# EAGLE board OLM-base_v0.8 (EAGLE 6.4)
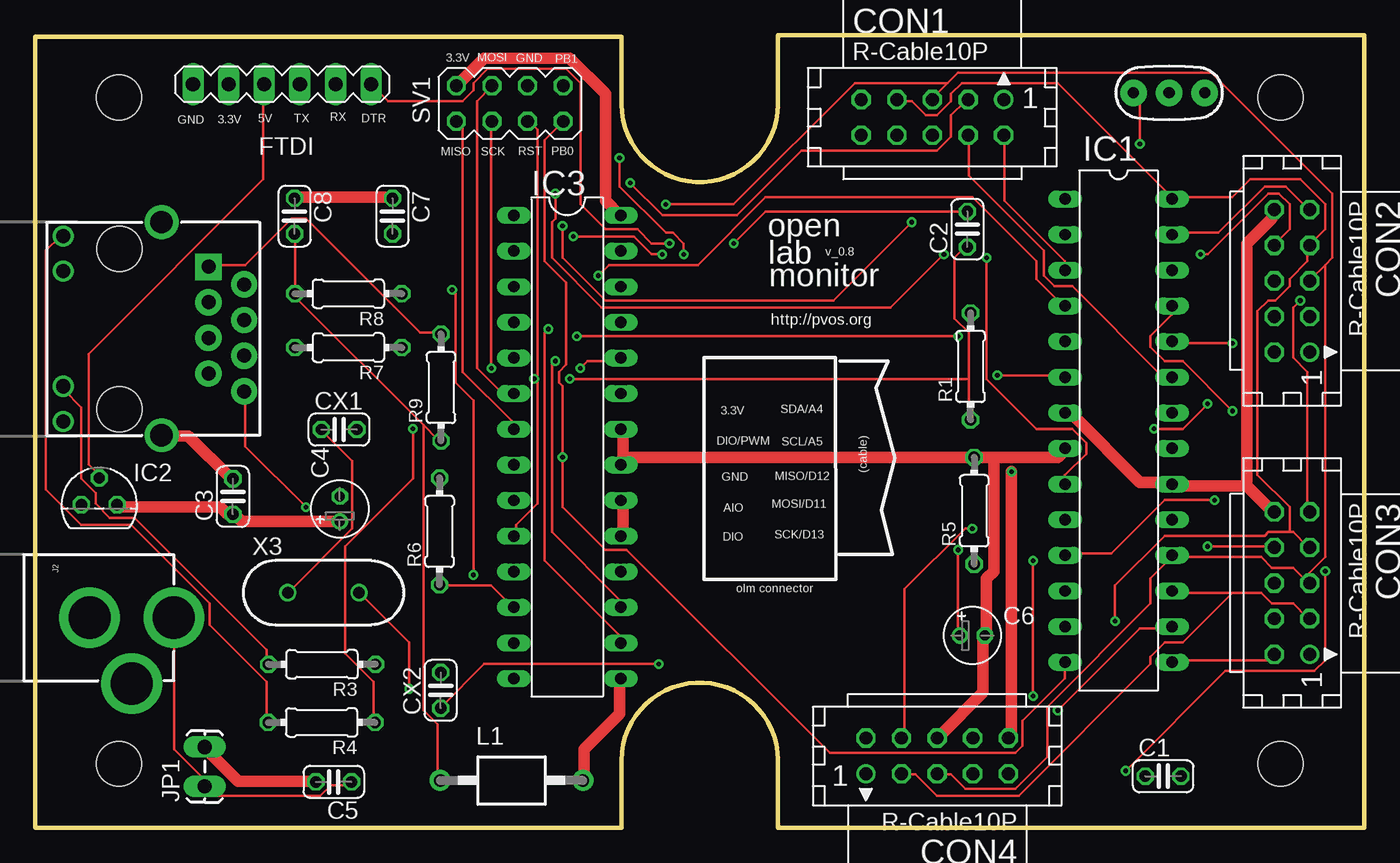
[diagram p0: board, top side]
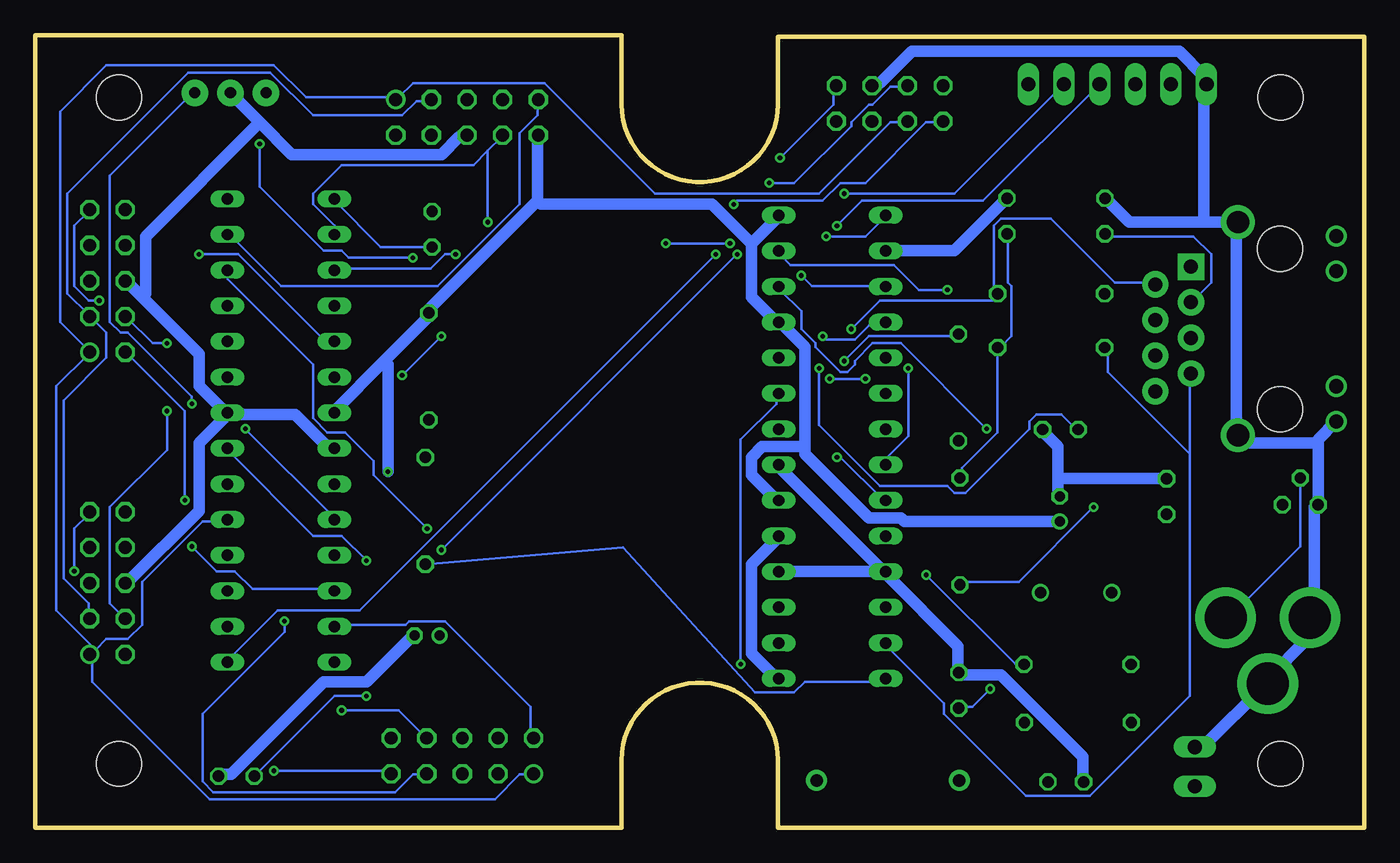
[diagram p1: board, bottom side, seen from below]

Size 94.74 x 56.52 mm. Coordinates in mm from the lower left corner, seen from the top.
Outline: 94.61,0 52.96,0 52.96,4.85
Outline: 41.78,4.9 41.78,0 0,0 0,56.39 41.78,56.39 41.78,51.51
Outline: 41.78,4.83 arc-179 52.96,4.83
Outline: 41.78,51.56 arc179 52.96,51.56 52.96,56.52 94.74,56.52 94.74,0
Copper layers (1*16): Top 0.0356mm / dielectric 1.5011mm / Bottom 0.0356mm
Design rules "LaenPCBOrder": minimum track width 6mil, minimum drill 13mil, track to track 6mil, track to pad 6mil, pad to pad 6mil, via to via 6mil, smd to smd 6mil, copper to edge 15mil, drill to drill 6mil, minimum pad ring 7mil, minimum via ring 7mil, stop-mask expansion 4mil, vias tented up to drill 0mil, thermal gap 10mil
Net classes: 0 default: width 0.178 mm, drill 0.33 mm, clearance 0.203 mm; 1 power: width 0.813 mm, drill 0.33 mm, clearance 0.203 mm to class 0, clearance 0.203 mm; 2 gnd: width 0.305 mm, drill 0.559 mm, clearance 0.203 mm to class 0, clearance 0.203 mm to class 1, clearance 0.254 mm
Holes 3.2 mm at 5.97,52.07 88.77,52.07 88.77,4.57 5.97,4.57

## Footprints (pad centres in the part's own frame; a part is rotated, then mirrored left to right if it is on the bottom)
C025-024X044 = drill 0.813 octagon: 1 -1.27,0; 2 1.27,0
E1,8-4 = drill 0.711 pad 1.168: + -0.889,0 | drill 0.711 pad 1.168 octagon: - 0.889,0
CON10L = drill 0.914: 1 5.08,1.27 | drill 0.914 octagon: 2 5.08,-1.27; 3 2.54,1.27; 4 2.54,-1.27; 5 0,1.27; 6 0,-1.27; 7 -2.54,1.27; 8 -2.54,-1.27; 9 -5.08,1.27; 10 -5.08,-1.27
MA06-1 = drill 1.016 long: 1 0,0; 2 2.54,0; 3 5.08,0; 4 7.62,0; 5 10.16,0; 6 12.7,0
DIL28-3 = drill 0.813 long: 1 -16.51,-3.81; 2 -13.97,-3.81; 3 -11.43,-3.81; 4 -8.89,-3.81; 5 -6.35,-3.81; 6 -3.81,-3.81; 7 -1.27,-3.81; 8 1.27,-3.81; 9 3.81,-3.81; 10 6.35,-3.81; 11 8.89,-3.81; 12 11.43,-3.81; 13 13.97,-3.81; 14 16.51,-3.81; 15 16.51,3.81; 16 13.97,3.81; 17 11.43,3.81; 18 8.89,3.81; 19 6.35,3.81; 20 3.81,3.81; 21 1.27,3.81; 22 -1.27,3.81; 23 -3.81,3.81; 24 -6.35,3.81; 25 -8.89,3.81; 26 -11.43,3.81; 27 -13.97,3.81; 28 -16.51,3.81
TO92 = drill 0.813 octagon: 1 -1.27,0; 2 0,1.905; 3 1.27,0
MAGJACK = drill 1 pad 1.88 square: 1 3.175,17.445 | drill 1 pad 1.88: 2 4.445,19.985; 3 5.715,17.445; 4 6.985,19.985; 5 8.255,17.445; 6 9.525,19.985; 7 10.795,17.445; 8 12.065,19.985 | drill 1 pad 1.27: 9 1,7.1; 10 3.5,7.1; 11 11.7,7.1; 12 14.2,7.1 | drill 1.6 pad 2.184: M1 0,14.1; M2 15.2,14.1 | hole 3.2: 1.905,11.095; 13.335,11.095
POWER_JACK_PTH = drill 2.997 pad 4.318: GND 0,7.7; GNDBREAK 4.7,10.7; PWR 0,13.7
1X02_LOCK_LONGPADS = drill 1.016 long: 1 -0.127,0; 2 2.667,0
BL01RN1A = drill 0.9 pad 1.5: 1 -5.08,0; 2 5.08,0
0204/7 = drill 0.813 octagon: 1 -3.81,0; 2 3.81,0
MA04-2 = drill 0.9 octagon: 1 -3.81,-1.27; 2 -3.81,1.27; 3 -1.27,-1.27; 4 -1.27,1.27; 5 1.27,-1.27; 6 1.27,1.27; 7 3.81,-1.27; 8 3.81,1.27
RESONATOR-PTH = drill 0.8 pad 1.88: 1 -2.54,0; 2 0,0; 3 2.54,0
HC49US = drill 0.813: 1 -2.54,0; 2 2.54,0

## Placement (x,y rotation side)
C1  0.1µ  [C025-024X044]  80.39,3.68 0 top
C2  0.1µ  [C025-024X044]  66.45,42.67 90 top
C3  0.1µ  [C025-024X044]  14.1,23.62 90 top
C4  10µ  [E1,8-4]  21.72,22.73 90 top
C5  0.1µ  [C025-024X044]  21.29,3.28 180 top
C6  10u  [E1,8-4]  66.8,13.72 0 top
C7  0.1µ  [C025-024X044]  25.48,43.61 270 top
C8  0.1µ  [C025-024X044]  18.49,43.61 270 top
CON1  [CON10L]  63.96,50.65 0 top
CON2  [CON10L]  89.59,38.99 270 top
CON3  [CON10L]  89.59,17.45 270 top
CON4  [CON10L]  64.29,5.13 180 top
CX1  18p  [C025-024X044]  21.67,28.4 0 top
CX2  18p  [C025-024X044]  28.91,9.8 90 top
FTDI  FTDI  [MA06-1]  11.25,53.01 0 top
IC1  ATMEGA  [DIL28-3]  77.22,28.32 270 top
IC2  MCP1702-33  [TO92]  4.57,23.04 0 top
IC3  ENC28J60SP  [DIL28-3]  37.92,27.15 270 top
J1  MAGJACK  [MAGJACK]  -5.08,43.18 270 top
J2  POWER_JACKPTH  [POWER_JACK_PTH]  -3.81,14.99 270 top
JP1  BATT  [1X02_LOCK_LONGPADS]  12.09,3.1 90 top
L1  BL01RN1A  [BL01RN1A]  33.96,3.38 0 top
R1  10k  [0204/7]  66.67,32.89 90 top
R3  1K  [0204/7]  20.45,11.66 180 top
R4  1K  [0204/7]  20.42,7.52 180 top
R5  2.32K  [0204/7]  66.93,22.61 90 top
R6  49.9  [0204/7]  28.83,21.13 90 top
R7  49.9  [0204/7]  22.33,34.24 180 top
R8  49.9  [0204/7]  22.33,38.07 180 top
R9  49.9  [0204/7]  28.93,31.39 90 top
SV1  SPI/ISP  [MA04-2]  33.83,51.64 0 top
X1  16 MHz  [RESONATOR-PTH]  80.82,52.4 0 top
X3  25MHz  [HC49US]  20.55,16.76 0 top

## Library data of the parts
C1-C8 CX1 CX2 R1 = resistor
CON1-CON4 = con-harting; OC_FARNELL: unknown; OC_NEWARK: unknown
FTDI IC2 SV1 = JeeLabs
IC1 = atmega8
IC3 = microchip; MF: MICROCHIP; MPN: ENC28J60/SP; OC_FARNELL: 1084619; OC_NEWARK: 96K3661
J1 JP1 X1 X3 = SparkFun
J2 = SparkFun-Connectors
L1 = inductors
R3-R9 = rcl

## Nets
A0: CON1.4 IC1.23
A1: CON2.4 IC1.24
A2: CON3.4 IC1.25
A3: CON4.4 IC1.26
D0/RX: CON1.8 FTDI.4 IC1.2
D1/TX: CON1.2 FTDI.5 IC1.3
D2: IC1.4 IC3.3
D3/PWM: CON2.8 IC1.5
D4: IC1.6 IC3.4
D5/PWM: CON2.2 IC1.11
D6/PWM: CON3.8 IC1.12
D7: CON4.2 IC1.13
D10/PWM: CON4.8 IC1.16
GND [power]: C1.2 C3.2 C4.- C5.2 C6.- C7.1 C8.1 CON1.6 CON2.6 CON3.6 CON4.6 CX1.2 CX2.2 FTDI.1 IC1.8 IC1.22 IC2.1 IC3.2 IC3.11 IC3.18 IC3.21 IC3.22 J1.12 J1.M1 J1.M2 J2.GND J2.GNDBREAK JP1.2 R5.2 SV1.6 X1.2
LEDA: J1.11 R3.2
LEDB: J1.9 R4.2
MISO/D12: CON1.5 CON2.5 CON3.5 CON4.5 IC1.18 IC3.7 SV1.1
MOSI/D11: CON1.3 CON2.3 CON3.3 CON4.3 IC1.17 IC3.6 SV1.4
N$1: IC1.9 X1.1
N$19: C1.1 IC1.21
N$20: C2.2 FTDI.6
N$21: IC1.10 X1.3
N$36: J1.10
N$37: IC3.27 R3.1
N$39: IC3.26 R4.1
N$50: C6.+ IC3.1
N$51: IC3.14 R5.1
N$52: CX1.1 IC3.24 X3.1
N$53: CX2.1 IC3.23 X3.2
N$54: C7.2 R6.2 R7.1
PB0/D8: IC1.14 IC3.9 SV1.7
PB1/D9/PWM: CON3.2 IC1.15 SV1.8
RD+: IC3.13 J1.7 R7.2
RD-: IC3.12 J1.8 R6.1
RESET: C2.1 IC1.1 IC3.10 R1.1 SV1.5
SCK/D13: CON1.1 CON2.1 CON3.1 CON4.1 IC1.19 IC3.8 SV1.3
SCL/A5: CON1.7 CON2.7 CON3.7 CON4.7 IC1.28
SDA/A4: CON1.9 CON2.9 CON3.9 CON4.9 IC1.27
TCT: C8.2 J1.3 L1.1 R8.2 R9.1
TD+: IC3.17 J1.1 R9.2
TD-: IC3.16 J1.2 R8.1
VCC [power]: C3.1 C4.+ CON1.10 CON2.10 CON3.10 CON4.10 IC1.7 IC1.20 IC2.3 IC3.15 IC3.19 IC3.20 IC3.25 IC3.28 L1.2 R1.2 SV1.2
VIN: C5.1 FTDI.3 IC2.2 J2.PWR JP1.1

## Tracks (layer width: path | path; a pad name or v marks a point on that pad's centre or on a via)
A0
  Top 0.178: IC1.23 81.03,32.26 80.26,32.26 73.91,38.61 72.64,38.61 71.88,39.37 71.88,41.15 66.55,46.48 66.55,49.28 CON1.4
A1  (via drill 0.33)
  Top 0.178: v85.34,34.54 81.03,34.54 IC1.24
  Bottom 0.178: v85.34,34.54 86.36,34.54 88.14,36.32 CON2.4
A2  (via drill 0.33)
  Top 0.178: IC1.25 81.03,36.58 79.5,35.05 79.5,34.29 80.52,33.27 81.79,33.27 v85.34,29.72
  Bottom 0.178: v85.34,29.72 85.34,26.92 89.41,22.86 89.41,16 CON3.4
A3  (via drill 0.33)
  Top 0.178: v66.8,21.34 66.29,21.34 61.98,17.02 61.98,6.6 CON4.4
  Bottom 0.178: IC1.26 81.03,39.12 74.93,33.02 74.93,29.21 73.91,28.19 72.64,28.19 70.61,26.16 70.61,25.15 v66.8,21.34
D0/RX  (via drill 0.33)
  Top 0.178: v37.59,42.93 37.59,40.64 40.64,37.59 56.9,37.59 v62.48,43.18
  Bottom 0.178: IC1.2 73.41,42.93 74.93,44.45 74.93,45.21 72.9,47.24 63.5,47.24 62.48,48.26 | 62.48,48.26 61.47,49.28 CON1.8 | FTDI.4 27.18,44.7 35.81,44.7 v37.59,42.93 | 62.48,48.26 v62.48,43.18
D1/TX  (via drill 0.33)
  Top 0.178: IC1.3 73.41,40.39 69.09,44.7 69.09,49.28 CON1.2 | v37.08,45.21 37.08,43.43 36.83,43.18 36.83,40.64 40.39,37.08 60.96,37.08 v64.77,40.89
  Bottom 0.178: FTDI.5 29.21,45.21 v37.08,45.21 | v64.77,40.89 65.53,40.89 66.55,39.88 73.41,39.88 IC1.3
D2  (via drill 0.33)
  Top 0.178: v40.13,39.37 40.89,40.13 47.24,40.13 52.07,44.96 66.8,44.96 71.37,40.39 71.37,39.12 73.41,37.08 IC1.4
  Bottom 0.178: v40.13,39.37 39.37,38.61 34.29,38.61 IC3.3
D3/PWM  (via drill 0.33)
  Top 0.178: v83.06,40.89 83.57,40.89 87.88,45.21 88.65,45.21 89.41,44.45 89.41,42.67 88.39,41.66 CON2.8
  Bottom 0.178: v83.06,40.89 80.26,40.89 74.17,34.8 73.41,34.8 IC1.5
D4  (via drill 0.33)
  Top 0.178: v65.79,35.05 v38.61,35.05 | v68.58,32.26 73.41,32.26 IC1.6
  Bottom 0.178: v38.61,35.05 38.35,34.8 36.32,34.8 35.31,35.81 34.29,35.81 IC3.4 | v68.58,32.26 v65.79,35.05
D5/PWM  (via drill 0.33)
  Top 0.178: v84.07,23.37 80.52,23.37 76.71,19.56 73.41,19.56 IC1.11
  Bottom 0.178: v84.07,23.37 84.07,29.72 88.14,33.78 CON2.2
D6/PWM  (via drill 0.33)
  Top 0.178: v83.57,20.07 88.14,20.07 CON3.8
  Bottom 0.178: v83.57,20.07 81.79,18.29 80.52,18.29 79.25,17.02 73.41,17.02 IC1.12
D7
  Bottom 0.178: IC1.13 73.41,14.48 68.33,14.48 68.07,14.73 65.53,14.73 59.44,8.64 59.44,6.6 CON4.2
D10/PWM  (via drill 0.33)
  Top 0.178: v72.9,8.38 78.74,14.22 81.03,14.22 IC1.16
  Bottom 0.178: v72.9,8.38 68.83,8.38 67.06,6.6 CON4.8
GND
  Top 0.813: CON4.6 64.52,6.6 67.56,9.65 67.56,13.72 C6.- 67.82,13.97 67.82,17.78 68.33,18.29 68.33,26.42 | 68.33,26.42 72.9,26.42 73.41,26.92 IC1.8 | 68.33,26.42 R5.2 42.16,26.42 IC3.21 41.91,25.91 41.91,28.19 IC3.22 | C8.1 18.54,44.96 25.4,44.96 C7.1 | J1.M2 9.14,27.94 10.92,27.94 13.97,24.89 C3.2 | C5.2 19.81,3.3 14.48,3.3 12.19,5.59 JP1.2
  Bottom 0.813: C1.2 81.53,3.81 80.77,3.81 74.17,10.41 71.12,10.41 67.82,13.72 C6.- | 78.74,50.29 80.77,52.32 X1.2 | 78.74,50.29 76.45,48.01 65.79,48.01 64.52,49.28 64.01,49.28 CON1.6 | IC1.22 81.03,29.46 76.2,29.46 73.91,27.18 73.41,27.18 IC1.8 | CON3.6 88.14,17.53 83.06,22.61 83.06,27.43 81.28,29.21 IC1.22 | 87.12,37.85 83.06,33.78 83.06,31.5 81.28,29.72 IC1.22 | 87.12,37.85 88.14,38.86 CON2.6 | 78.74,50.29 86.87,42.16 86.87,38.1 87.12,37.85 | SV1.6 35.05,53.09 34.54,53.09 32.26,55.37 13.21,55.37 11.43,53.59 11.43,53.09 FTDI.1 11.43,52.83 11.43,43.18 | C7.1 29.21,41.15 34.04,41.15 IC3.2 | 11.43,43.18 16.76,43.18 18.29,44.7 C8.1 | 11.43,43.18 J1.M1 9.14,42.93 9.14,28.19 J1.M2 8.89,27.94 8.38,27.43 3.3,27.43 | IC3.11 34.04,18.03 28.96,12.95 28.96,11.18 CX2.2 28.7,10.92 25.91,10.92 20.07,5.08 20.07,3.3 C5.2 | IC3.18 41.66,18.29 34.54,18.29 IC3.11 | IC3.21 41.66,25.65 34.54,18.54 IC3.11 | 3.3,27.43 3.3,27.69 2.03,28.96 J1.12 | 3.3,27.43 IC2.1 3.56,22.86 3.56,14.99 J2.GND 4.06,14.99 4.06,13.46 6.86,10.67 J2.GNDBREAK 7.11,10.16 11.43,5.84 11.94,5.84 JP1.2 | 21.84,24.89 21.84,27.18 22.86,28.19 CX1.2 | 21.84,24.89 21.84,23.62 C4.- | 21.84,24.89 C3.2
LEDA
  Top 0.178: R3.2 16.51,11.68 16.51,12.7 7.11,22.1 5.33,22.1 4.32,23.11 4.32,23.88 3.3,24.89 3.3,29.97 2.03,31.24 J1.11
LEDB
  Top 0.178: R4.2 16.51,7.62 16.51,10.41 12.45,14.48 12.45,16 6.86,21.59 3.3,21.59 0.76,24.13 0.76,41.15 1.78,42.16 J1.9
MISO/D12  (via drill 0.33)
  Top 0.178: 81.03,19.3 87.38,19.3 88.14,18.54 89.66,18.54 90.42,17.78 | 90.42,17.78 90.68,17.53 CON3.5 90.42,17.78 | 81.03,19.3 79.5,17.78 79.5,16 72.14,8.64 72.14,5.08 69.85,2.79 66.29,2.79 65.28,3.81 64.52,3.81 CON4.5 | 81.03,19.3 IC1.18 | IC3.7 34.04,28.45 34.04,28.96 30.48,32.51 30.48,50.04 30.23,50.29 SV1.1 | 65.02,53.09 65.79,53.85 83.82,53.85 92.46,45.21 92.46,40.64 91.95,40.13 | 65.02,53.09 64.01,52.07 CON1.5 | 91.95,40.13 90.93,39.12 CON2.5 | v44.96,44.45 49.78,44.45 58.42,53.09 65.02,53.09 | 90.42,17.78 91.95,19.3 91.95,40.13
  Bottom 0.178: v44.96,44.45 44.7,44.7 38.61,44.7 37.34,45.97 35.56,45.97 31.24,50.29 30.23,50.29 SV1.1
MOSI/D11  (via drill 0.33)
  Top 0.178: 85.34,16.76 87.38,16.76 88.14,16 89.66,16 90.68,14.99 CON3.3 | 85.34,16.76 81.03,16.76 IC1.17 | 85.34,16.76 81.79,13.21 80.52,13.21 79.5,12.19 79.5,11.68 70.1,2.29 64.26,2.29 62.74,3.81 61.98,3.81 CON4.3 | IC3.6 34.04,30.99 33.27,30.99 31.5,32.77 31.5,51.82 32.51,52.83 SV1.4 | v42.42,45.97 44.7,43.69 50.04,43.69 54.61,48.26 64.26,48.26 65.28,49.28 65.28,50.8 66.29,51.82 CON1.3
  Bottom 0.178: CON1.3 66.55,51.82 67.56,51.82 68.58,50.8 74.93,50.8 77.98,53.85 83.82,53.85 92.46,45.21 92.46,38.1 90.93,36.58 CON2.3 90.68,36.32 89.66,35.31 89.66,33.53 92.71,30.48 92.71,17.78 90.93,16 90.93,14.99 CON3.3 | v42.42,45.97 40.64,45.97 36.58,50.04 36.58,50.29 35.31,51.56 35.05,51.56 33.78,52.83 32.77,52.83 SV1.4
N$1  (via drill 0.33)
  Top 0.178: IC1.9 73.41,25.15 74.93,26.67 74.93,27.43 73.91,28.45 71.37,28.45 67.82,32 v67.82,40.64 | v78.74,48.77 78.74,52.07 78.49,52.32 X1.1
  Bottom 0.178: v67.82,40.64 72.39,40.64 72.9,41.15 74.17,41.15 78.74,45.72 v78.74,48.77
N$19  (via drill 0.33)
  Top 0.178: v71.12,19.05 v71.12,9.4
  Bottom 0.178: C1.1 73.41,9.4 v71.12,9.4 | v71.12,19.05 72.9,20.83 74.93,20.83 81.03,26.92 IC1.21
N$20  (via drill 0.33)
  Top 0.178: C2.2 52.07,43.94 v49.78,41.66 | v45.21,41.66 43.94,41.66 42.93,42.67 40.64,42.67 38.86,44.45 38.86,53.09 37.85,54.1 32.26,54.1 31.24,53.09 31.24,52.58 30.48,51.82 25.15,51.82 FTDI.6
  Bottom 0.178: v45.21,41.66 v49.78,41.66
N$21  (via drill 0.33)
  Top 0.178: v79.76,28.45 81.79,28.45 v83.57,30.23
  Bottom 0.178: v79.76,28.45 73.41,22.1 IC1.10 | v83.57,30.23 83.57,30.73 88.14,35.31 88.65,35.31 89.41,36.07 89.41,46.48 83.57,52.32 X1.3
N$37  (via drill 0.33)
  Top 0.178: v31.24,18.03 31.24,30.48 29.97,31.75 29.97,38.1 v29.72,38.35
  Bottom 0.178: v31.24,18.03 24.89,11.68 24.38,11.68 R3.1 | v29.72,38.35 31.75,38.35 33.53,40.13 40.89,40.13 41.66,40.89 IC3.27
N$39  (via drill 0.33)
  Top 0.178: v26.92,28.45 26.92,24.89 22.1,20.07 22.1,12.45 24.13,10.41 24.13,7.62 R4.1
  Bottom 0.178: v26.92,28.45 33.02,34.54 35.05,34.54 36.32,33.27 36.32,33.02 36.83,32.51 37.34,32.51 39.12,34.29 39.12,34.54 40.13,35.56 40.13,36.83 41.66,38.35 IC3.26
N$50  (via drill 0.33)
  Top 0.178: v65.79,19.81 65.79,13.72 C6.+ | v44.7,40.89 43.94,40.89 42.67,42.16 v38.35,42.16
  Bottom 0.178: v44.7,40.89 v65.79,19.81 | v38.35,42.16 35.56,42.16 34.29,43.43 IC3.1
N$51
  Bottom 0.178: R5.1 52.83,19.99 43.43,9.65 40.64,9.65 39.88,10.41 34.29,10.41 IC3.14
N$52  (via drill 0.33)
  Top 0.178: X3.1 18.03,16.76 22.61,21.34 22.61,26.16 20.57,28.19 CX1.1 | v38.86,32.77 39.37,33.27 41.66,33.27 IC3.24
  Bottom 0.178: v38.86,32.77 38.86,28.7 34.54,24.38 29.72,24.38 29.21,23.88 28.45,23.88 23.88,28.45 23.88,28.96 23.37,29.46 21.59,29.46 20.57,28.45 CX1.1
N$53  (via drill 0.33)
  Top 0.178: v26.67,9.91 26.67,13.21 23.11,16.76 X3.2 | v44.45,11.68 32,11.68 28.96,8.64 CX2.1
  Bottom 0.178: v26.67,9.91 27.94,8.64 28.7,8.64 CX2.1 | v44.45,11.68 44.45,27.69 41.91,30.23 41.91,30.73 IC3.23
N$54
  Bottom 0.178: R6.2 28.7,25.15 28.7,25.65 26.16,28.19 26.16,34.04 R7.1 25.91,34.29 25.15,35.05 25.15,38.61 25.4,38.86 25.4,42.16 C7.2
PB0/D8  (via drill 0.33)
  Top 0.178: SV1.7 37.59,50.29 36.32,49.02 36.32,40.39 37.85,38.86 37.85,33.02 37.34,32.51 37.34,31.75 37.59,31.5 v37.59,26.42 37.59,22.86 40.64,19.81 42.16,19.81 56.64,5.33 69.85,5.33 70.36,5.84 70.36,7.62 73.41,10.67 IC1.14
  Bottom 0.178: v37.59,26.42 37.34,26.42 34.29,23.37 IC3.9
PB1/D9/PWM  (via drill 0.33)
  Top 0.178: CON3.2 87.88,11.94 81.03,11.94 IC1.15 | v41.66,47.75 41.66,45.72 44.96,42.42 45.47,42.42 46.23,41.66 v46.23,40.89
  Bottom 0.178: v41.66,47.75 37.85,51.56 37.85,52.83 SV1.8 | v46.23,40.89 71.63,15.49 77.47,15.49 81.03,11.94 IC1.15
RD+
  Bottom 0.178: 12.45,26.67 12.45,32.26 J1.7 | 12.45,26.67 12.45,9.4 19.56,2.29 24.13,2.29 29.97,8.13 29.97,8.89 34.04,12.95 IC3.13 | 12.45,26.67 18.29,32.51 18.29,34.04 R7.2
RD-  (via drill 0.33)
  Top 0.178: R6.1 28.96,17.27 32.51,17.27 34.04,15.75 IC3.12 | v19.3,22.86 14.99,27.18 14.99,30.99 J1.8
  Bottom 0.178: v19.3,22.86 24.64,17.53 28.7,17.53 R6.1
RESET  (via drill 0.33)
  Top 0.178: 66.55,32 66.55,35.31 65.53,36.32 65.53,40.64 66.29,41.4 C2.1 | 66.55,32 66.55,29.21 R1.1 | 35.81,32 35.81,49.78 35.31,50.29 SV1.5 | 35.81,32 35.81,23.11 34.29,21.59 34.29,20.83 IC3.10 | v38.1,32 66.55,32 | 35.81,32 v35.56,32
  Bottom 0.178: C2.1 70.1,41.4 73.41,44.7 IC1.1 | v35.56,32 v38.1,32
SCK/D13  (via drill 0.33)
  Top 0.178: v32.51,32.77 32.51,50.29 SV1.3
  Bottom 0.178: 90.42,12.7 90.68,12.45 CON3.1 | 90.42,12.7 89.66,13.46 88.14,13.46 87.12,14.48 87.12,17.53 82.8,21.84 81.03,21.84 IC1.19 | CON4.1 59.44,3.81 60.2,3.81 61.98,2.03 82.3,2.03 90.68,10.41 90.68,12.19 CON3.1 | v32.51,32.77 32.51,27.94 34.04,26.42 34.04,25.91 IC3.8 | SV1.3 32.77,50.29 33.78,50.29 38.86,45.21 50.55,45.21 58.42,53.09 67.82,53.09 68.83,52.07 CON1.1 69.09,52.07 75.44,52.07 77.72,54.36 89.66,54.36 92.96,51.05 92.96,36.07 90.93,34.04 CON2.1 90.93,33.78 93.22,31.5 93.22,15.49 90.42,12.7 | 90.42,12.7 CON3.1
SCL/A5  (via drill 0.33)
  Top 0.178: 81.03,44.96 85.34,44.96 86.61,46.23 90.17,46.23 91.95,44.45 91.95,42.67 90.93,41.66 CON2.7 90.68,41.4 90.68,40.39 89.41,39.12 89.41,38.61 88.39,37.59 87.88,37.59 87.12,36.83 87.12,25.15 89.41,22.86 89.41,21.08 | 81.03,44.96 72.9,53.09 66.04,53.09 65.28,52.32 65.28,51.82 64.26,50.8 63.5,50.8 62.48,51.82 61.47,51.82 CON1.7 | 81.03,44.96 IC1.28 | v76.96,14.73 76.96,17.27 80.52,20.83 87.63,20.83 87.88,21.08 89.41,21.08 | 89.41,21.08 89.66,21.08 90.68,20.07 CON3.7
  Bottom 0.178: v76.96,14.73 76.96,13.97 82.8,8.13 82.8,3.3 82.04,2.54 69.09,2.54 67.82,3.81 67.06,3.81 CON4.7
SDA/A4  (via drill 0.33)
  Top 0.178: v77.72,4.06 84.84,11.18 91.19,11.18 91.95,11.94 v91.95,18.29 | IC1.27 81.03,42.42 84.33,42.42 87.63,45.72 89.15,45.72 90.68,44.2 CON2.9 | v90.17,37.59 89.66,37.08 89.66,33.53 90.68,32.51 90.68,22.61 CON3.9
  Bottom 0.178: v77.72,4.06 69.6,4.06 CON4.9 | v91.95,18.29 91.95,21.34 90.93,22.35 CON3.9 | CON1.9 58.93,51.82 58.93,50.8 60.2,49.53 60.2,44.45 66.04,38.61 77.22,38.61 81.03,42.42 IC1.27 | v90.17,37.59 90.93,37.59 91.95,38.61 91.95,42.93 90.93,43.94 CON2.9
TCT
  Top 0.178: C8.2 18.54,42.16 18.54,38.1 R8.2 18.54,37.85 27.69,28.7 | 27.69,28.7 28.7,27.69 R9.1 | 27.69,28.7 27.69,8.38 28.7,7.37 28.7,3.56 L1.1
  Bottom 0.178: J1.3 12.19,37.59 10.92,38.86 10.92,40.89 12.19,42.16 18.29,42.16 C8.2
TD+  (via drill 0.33)
  Top 0.178: v37.08,33.27 36.83,33.02 36.83,21.08 41.66,16.26 41.66,15.75 IC3.17 | J1.1 12.45,40.13 14.99,40.13 18.29,43.43 19.3,43.43 27.43,35.31 28.7,35.31 R9.2
  Bottom 0.178: v37.08,33.27 35.31,35.05 28.96,35.05 R9.2
TD-  (via drill 0.33)
  Top 0.178: v36.58,35.56 36.32,35.31 36.32,19.05 41.66,13.72 41.66,13.21 IC3.16
  Bottom 0.178: v36.58,35.56 34.54,37.59 26.42,37.59 | 26.42,37.59 26.16,37.85 R8.1 26.42,37.59 | 26.42,37.59 26.42,42.93 25.91,43.43 22.35,43.43 17.78,38.86 14.99,38.86 J1.2
VCC  (via drill 0.33)
  Top 0.813: 86.36,24.38 81.03,24.38 IC1.20 80.77,24.64 78.74,24.64 73.91,29.46 73.41,29.46 IC1.7 | 86.36,24.38 88.14,22.61 CON3.10 | 86.36,24.38 86.36,41.66 88.14,43.43 88.14,43.94 CON2.10 | v69.6,25.4 69.6,6.6 CON4.10 | IC3.19 41.91,20.83 41.91,23.11 IC3.20 | IC3.15 41.66,10.41 41.66,8.13 39.12,5.59 39.12,3.56 L1.2 | C4.+ 14.73,21.84 14.22,22.35 C3.1 13.72,22.35 13.21,22.86 5.84,22.86 IC2.3 | SV1.2 30.23,53.09 32,54.86 38.1,54.86 40.64,52.32 40.64,44.7 41.66,43.69 IC3.28
  Bottom 0.813: 69.85,33.27 66.55,36.58 R1.2 66.55,37.08 58.93,44.7 | 69.85,33.27 73.41,29.72 IC1.7 | v69.6,25.4 69.6,33.02 69.85,33.27 | 58.93,44.7 58.93,49.28 CON1.10 | IC3.19 41.91,20.57 43.69,18.8 43.69,12.45 41.91,10.67 IC3.15 | 43.69,41.66 43.69,37.85 41.91,36.07 IC3.25 41.4,35.81 39.88,34.29 39.88,27.18 | 43.69,41.66 41.91,43.43 IC3.28 | C4.+ 32.77,21.84 33.02,22.1 35.31,22.1 39.88,26.67 39.88,27.18 | 39.88,27.18 42.93,27.18 43.69,26.42 43.69,25.15 41.91,23.37 IC3.20 | 43.69,41.66 46.48,44.45 58.67,44.45 58.93,44.7
VIN
  Top 0.178: C5.1 22.35,3.05 21.08,3.05 20.32,2.29 12.7,2.29 12.19,2.79 JP1.1 11.94,3.05 11.94,3.56 9.91,5.59 9.91,14.99 J2.PWR | FTDI.3 16.26,52.83 16.26,46.23 3.81,33.78 3.81,25.91 4.57,25.15 IC2.2
  Bottom 0.178: IC2.2 4.57,20.07 9.65,14.99 J2.PWR

## Text on the board
tPlace: 3.3V | MOSI | GND | PB1 | GND | 3.3V | 5V | TX | RX | DTR | MISO | SCK | PB0 | RST | open | v_0.8 | lab | monitor | http://pvos.org | SDA/A4 | 3.3V | DIO/PWM | SCL/A5 | GND | MISO/D12 | (cable) | AIO | MOSI/D11 | SCK/D13 | DIO | olm connector